# Altium PCB PCB.PcbDoc
Units mm, origin at the board's own origin, x right, y up, seen from the top; angles counter-clockwise.
Board outline 200 x 100 mm, 2 copper layers (Top Layer, Bottom Layer); 95 components, 63 nets, 298 pads, 0 vias.
Unrouted connection lines stored in the file: 204.
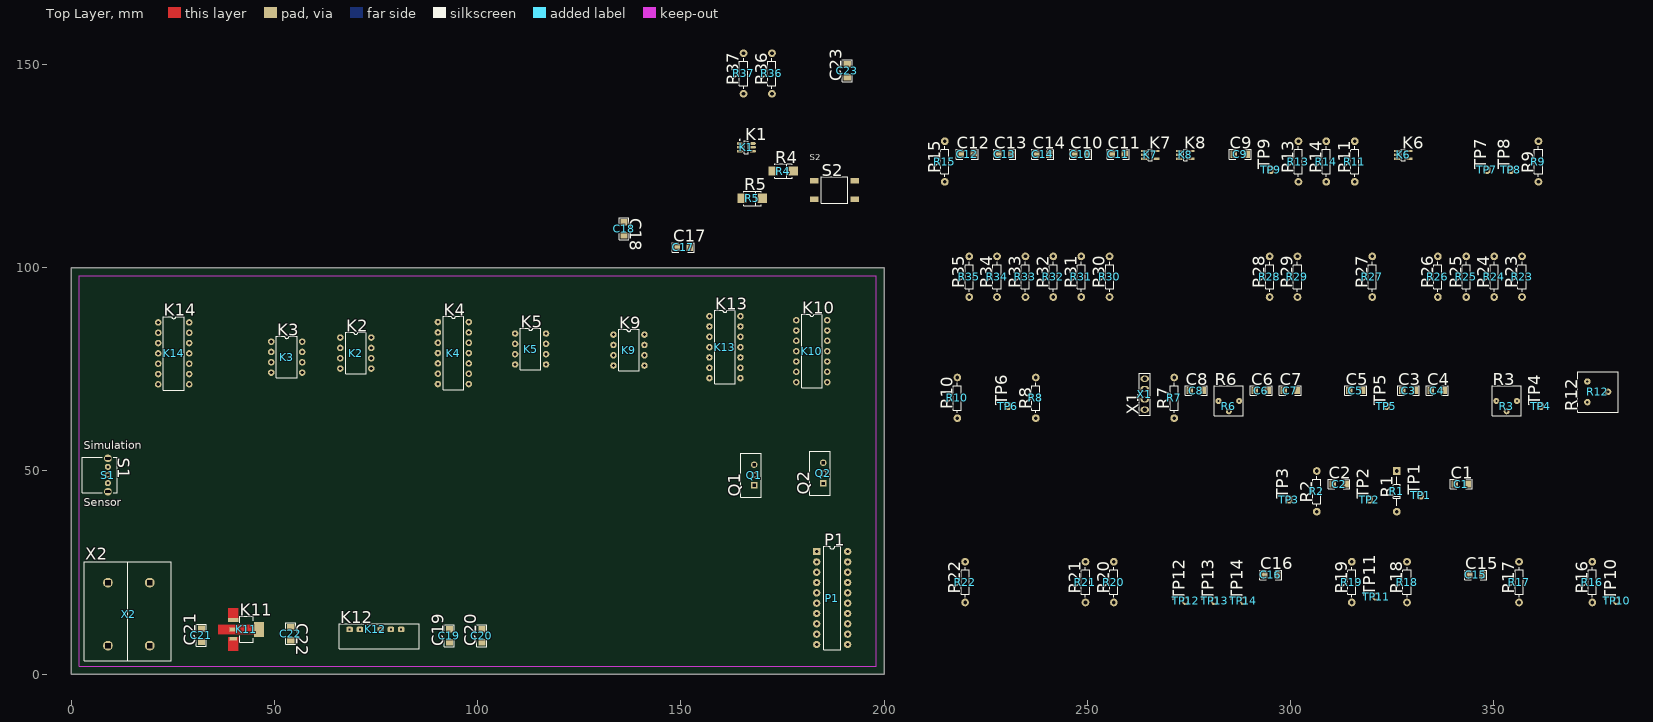
[diagram p0: Top Layer view]
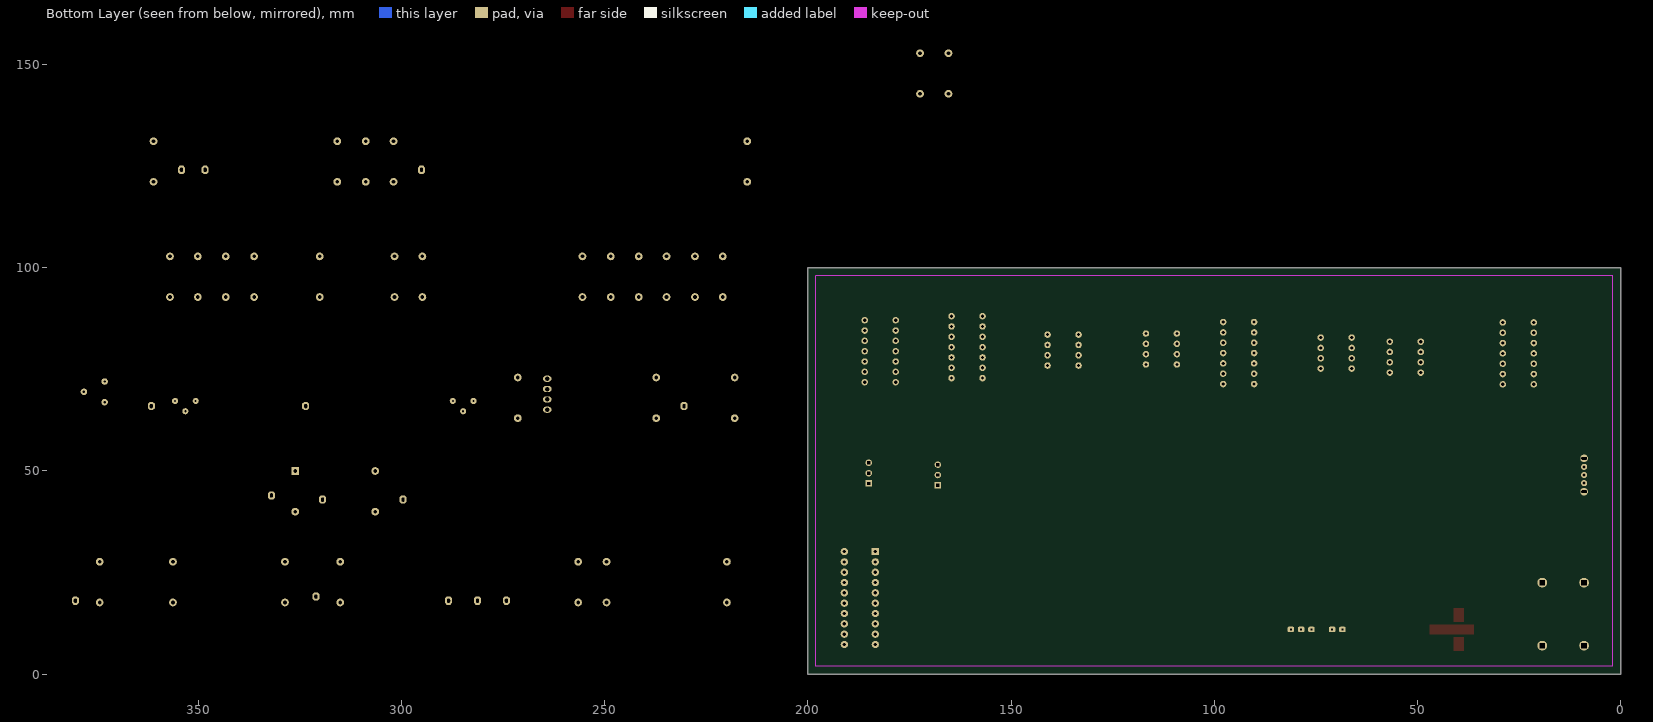
[diagram p1: Bottom Layer view, seen from below]

## Layer stack, top to bottom
Top Solder: solder mask 0.0102, Solder Resist, Dk 3.5
Top Layer: signal copper 0.0356
Dielectric 1: dielectric 0.32, FR-4, Dk 4.8
Bottom Layer: signal copper 0.0356
Bottom Solder: solder mask 0.0102, Solder Resist, Dk 3.5

## Board outline
0,0 200,0 200,100 0,100

## Design rules (kind name [scope] priority, off if disabled: settings)
Clearance [All] p1: gap=0.254 ignorepadtopadclearanceinfootprint=FALSE except(0: Arc-Hole Track-Hole SMDPad-Hole THPad-Hole Via-Hole Fill-Hole Poly-Hole Region-Hole Text-Hole)
PolygonConnect [All] p1: connectstyle=Relief reliefconductorwidth=0.254 reliefentries=4 polygonreliefangle="90 Angle" airgapwidth=0.254
RoutingVias [All] p1: holewidth=0.711 width=1.27 viastyle="Through Hole" minholewidth=0.711 minwidth=1.27 maxholewidth=0.711 maxwidth=1.27
SilkToSilkClearance [All] p1 off: silktosilkclearance=0.254
SolderMaskExpansion [All] p1: expansion=0.102 istentingtop=FALSE
Width Width_Power [InNetClass('Power')] p1: maxlimit=1.27 minlimit=0.381 preferedwidth=0.508
Width [All] p2: maxlimit=0.254 minlimit=0.254 preferedwidth=0.254
29 further rules are at their usual default settings.

## Classes and differential pairs
net class Power: +15 -15 GND NetC21_2 NetC?_2 Vcc

## Components (designator, comment, footprint, x,y, rotation, side; value= is the part's Value field where it differs from the comment)
C1 "1uF" "okCAP CER 1206 H" 341.992,46.764 r0 top
C2 "100nF" "okCAP CER 1206 H" 311.893,46.764 r0 top
C3 "100nF" "okCAP CER 1206 H" 328.995,69.764 r0 top
C4 "100nF" "okCAP CER 1206 H" 336.107,69.764 r0 top
C5 "1uF" "okCAP CER 1206 H" 316.041,69.764 r0 top
C6 "100nF" "okCAP CER 1206 H" 292.8,69.764 r0 top
C7 "100nF" "okCAP CER 1206 H" 299.912,69.764 r0 top
C8 "4.7uF" "okCAP CER 1206 H" 276.798,69.764 r0 top
C9 "100nF" "okCAP CER 1206 H" 287.557,127.901 r0 top
C10 "NM" "okCAP CER 1206 H" 248.314,127.901 r0 top
C11 "330nF" "okCAP CER 1206 H" 257.585,127.901 r0 top
C12 "1.5uF" "okCAP CER 1206 H" 220.374,127.901 r0 top
C13 "100nF" "okCAP CER 1206 H" 229.645,127.901 r0 top
C14 "1.5uF" "okCAP CER 1206 H" 239.043,127.901 r0 top
C15 "100nF" "okCAP CER 1206 H" 345.524,24.425 r0 top
C16 "100nF" "okCAP CER 1206 H" 295.105,24.425 r0 top
C17 "100nF" "okCAP CER 1206 H" 150.6,105 r0 top
C18 "100nF" "okCAP CER 1206 H" 136,109.6 r270 top
C19 "0.1uF" "okCAP CER 1206 H" 93,9.4 r90 top
C20 "0.1uF" "okCAP CER 1206 H" 101,9.4 r90 top
C21 "0.33uF" "okCAP CER 1206 H" 32,9.6 r90 top
C22 "0.1uF" "okCAP CER 1206 H" 54,10 r270 top
C23 "100nF" "okCAP CER 1206 H" 190.915,148.419 r90 top
K1 "M74VHC1G132DTT1G" okTSOP-5 166.074,129.623 r0 top
K2 "RC4558" okDIP8-300 70,79 r0 top
K3 "RC4558" okDIP8-300 53,78 r0 top
K4 "CD74HCT74E" okDIP14-300 94,79 r0 top
K5 "ICM7555IPAZ" okDIP8-300 113,80 r0 top
K6 "74LVC1G14SE-7" okSOT23-5 327.689,127.774 r0 top
K7 "74LVC1G14SE-7" okSOT23-5 265.459,127.774 r0 top
K8 "74LVC1G14SE-7" okSOT23-5 274.095,127.774 r0 top
K9 "RC4558" okDIP8-300 137.19,79.73 r0 top
K10 "MCP6004-I/P" okDIP14-300 182.19,79.46 r0 top
K11 "UA78M05CDCYR" okSOT23-UA78M05 43,11 r0 top
K12 "TBA 1-0523E" "OKTBA 1-0523E" 68.46,11 r0 top
K13 "MCP6004-I/P" okDIP14-300 160.81,80.46 r0 top
K14 "MCP6004-I/P" okDIP14-300 25.19,78.92 r0 top
P1 "LTA-1000G" okDIP20 183.38,30.16 r0 top
Q1 "IRF610" okTO-220-1 168,46.46 r90 top
Q2 "IRF610" okTO-220-1 185,46.92 r90 top
R1 "1N4148" "okDiode 10mm" 326.117,44.986 r90 top
R2 "Resistor" "okRES 10mm" 306.432,44.986 r90 top value=39k
R3 "RPot" ok3362P 350.585,67.224 r0 top value=2k
R4 "MBRS360T3G" "okDiode DO-214AA SMB H" 175.167,123.781 r0 top
R5 "MBRS360T3G" "okDiode DO-214AA SMB H" 167.547,117.05 r0 top
R6 "RPot" ok3362P 282.259,67.224 r0 top value=2k
R7 "Resistor" "okRES 10mm" 271.337,67.986 r90 top value=150
R8 "Resistor" "okRES 10mm" 237.301,67.986 r90 top value=150
R9 "Resistor" "okRES 10mm" 360.963,126.123 r90 top value=1k
R10 "Resistor" "okRES 10mm" 217.997,67.986 r90 top value=1k
R11 "Resistor" "okRES 10mm" 315.751,126.123 r90 top value=1k
R12 "RPot" ok3386F 373,66.92 r90 top value=100k
R13 "Resistor" "okRES 10mm" 301.908,126.123 r90 top value=1.5k
R14 "Resistor" "okRES 10mm" 308.766,126.123 r90 top value=1.5k
R15 "Resistor" "okRES 10mm" 214.913,126.123 r90 top value=10k
R16 "Resistor" "okRES 10mm" 374.226,22.647 r90 top value=10k
R17 "Resistor" "okRES 10mm" 356.192,22.647 r90 top value=250
R18 "Resistor" "okRES 10mm" 328.633,22.647 r90 top value=500
R19 "Resistor" "okRES 10mm" 315.044,22.647 r90 top value=500
R20 "Resistor" "okRES 10mm" 256.497,22.647 r90 top value=500
R21 "Resistor" "okRES 10mm" 249.512,22.647 r90 top value=270
R22 "Resistor" "okRES 10mm" 219.902,22.647 r90 top value=270
R23 "Resistor" "okRES 10mm" 356.917,97.784 r90 top value=270
R24 "Resistor" "okRES 10mm" 350.059,97.784 r90 top value=500
R25 "Resistor" "okRES 10mm" 343.201,97.784 r90 top value=270
R26 "Resistor" "okRES 10mm" 336.216,97.784 r90 top value=270
R27 "Resistor" "okRES 10mm" 320.087,97.784 r90 top value=270
R28 "Resistor" "okRES 10mm" 294.814,97.784 r90 top value=500
R29 "Resistor" "okRES 10mm" 301.672,97.784 r90 top value=270
R30 "Resistor" "okRES 10mm" 255.444,97.784 r90 top value=270
R31 "Resistor" "okRES 10mm" 248.459,97.784 r90 top value=270
R32 "Resistor" "okRES 10mm" 241.601,97.784 r90 top value=270
R33 "Resistor" "okRES 10mm" 234.743,97.784 r90 top value=500
R34 "Resistor" "okRES 10mm" 227.758,97.784 r90 top value=500
R35 "Resistor" "okRES 10mm" 220.9,97.784 r90 top value=500
R36 "Resistor" "okRES 10mm" 172.373,147.784 r90 top value=500
R37 "Resistor" "okRES 10mm" 165.388,147.784 r90 top value=250
S1 "Schiebeschalter" okSCHIEBESCHALTER 9,53.1 r270 top
S2 "SW-PB" okdrucktaster 182.787,121.368 r0 top
TP1 "Lötstützpunkt" okLötstützpunkt 331.959,43.97 r90 top
TP2 "Lötstützpunkt" okLötstützpunkt 319.386,42.954 r90 top
TP3 "Lötstützpunkt" okLötstützpunkt 299.574,42.954 r90 top
TP4 "Lötstützpunkt" okLötstützpunkt 361.507,65.954 r90 top
TP5 "Lötstützpunkt" okLötstützpunkt 323.534,65.954 r90 top
TP6 "Lötstützpunkt" okLötstützpunkt 230.443,65.954 r90 top
TP7 "Lötstützpunkt" okLötstützpunkt 348.263,124.091 r90 top
TP8 "Lötstützpunkt" okLötstützpunkt 354.105,124.091 r90 top
TP9 "Lötstützpunkt" okLötstützpunkt 295.05,124.091 r90 top
TP10 "Lötstützpunkt" okLötstützpunkt 380.195,18.075 r90 top
TP11 "Lötstützpunkt" okLötstützpunkt 321.013,19.091 r90 top
TP12 "Lötstützpunkt" okLötstützpunkt 274.15,18.075 r90 top
TP13 "Lötstützpunkt" okLötstützpunkt 281.262,18.075 r90 top
TP14 "Lötstützpunkt" okLötstützpunkt 288.374,18.075 r90 top
X1 "Header 4" "okHeader Female 4pin" 264.098,65.065 r90 top
X2 "Baureihe A-2.107" ok24.243.X 19.3,7 r180 top

## Footprints (in the part's own frame and the unit in brackets; to place one, negate y for a bottom-side part, rotate by r counter-clockwise, add the part's x,y. Pads: shape width x height; smd on the part's side, far side on the other; paste and mask are expansions set on the pad)
ok24.243.X [mm] "Bananenstecker"
  round 2.4 hole 1.3 square: A1(0,0) A2(0,-15.5) B1(10.3,0) B2(10.3,-15.5)
  silkscreen extent -5.28,-20.7 16.15,3.7, body extent -5.05,-20.5 15.95,3.5, height 13
ok3362P [mm]
  round 1.5 hole 0.5: 1(0,0) 2(2.54,-2.54) 3(5.08,0)
  silkscreen extent -1.05,-3.62 6.12,3.72, body extent -0.75,-3.44 5.85,3.54, height 4.4
ok3386F [mm]
  round 1.6 hole 0.6: 1(5.08,0) 2(2.54,-5.08) 3(0,0)
  silkscreen extent -2.45,-7.54 7.52,2.41, body extent -2.24,-7.35 7.32,2.21, height 4.83
"okCAP CER 1206 H" [mm] "1206 ceramic capacitor for hand soldering"
  rect 1.6x1.75 smd: 1(-1.6,0) 2(1.6,0)
  silkscreen extent -2.7,-1.2 2.7,1.2, body extent -1.6,-0.8 1.6,0.8, height 1.15
"okDiode 10mm" [mm] "Diode for tht mounting with a 10mm pitch"
  rect 1.9x1.9 hole 0.9: A(5,0)
  round 1.9 hole 0.9: C(-5,0)
  silkscreen extent -3.6,-0.9 3.6,0.9, body extent -5.35,-0.9 5.36,0.9, height 1.82
"okDiode DO-214AA SMB H" [mm] "Diode in DO-214AA (same as SMB) package for hand soldering"
  rect 2.3x2.3 smd: 1(2.45,0) 3(-2.45,0)
  silkscreen extent -2.15,-1.8 2.15,1.8, body extent -2.7,-1.8 2.7,1.8, height 2.3
okDIP8-300 [mm] "DIP8 300mil width"
  round 1.6 hole 0.8: 1(-3.81,3.81) 2(-3.81,1.27) 3(-3.81,-1.27) 4(-3.81,-3.81) 5(3.81,-3.81) 6(3.81,-1.27) 7(3.81,1.27) 8(3.81,3.81)
  silkscreen extent -2.54,-5.08 2.54,5.08, body extent -3.88,-5.4 3.88,5.4, height 4.5
okDIP14-300 [mm] "DIP14 300mil width"
  round 1.6 hole 0.8: 1(-3.81,7.62) 2(-3.81,5.08) 3(-3.81,2.54) 4(-3.81,0) 5(-3.81,-2.54) 6(-3.81,-5.08) 7(-3.81,-7.62) 8(3.81,-7.62) 9(3.81,-5.08) 10(3.81,-2.54) 11(3.81,0) 12(3.81,2.54) 13(3.81,5.08) 14(3.81,7.62)
  silkscreen extent -2.54,-9.05 2.54,9.05, body extent -3.88,-9.05 3.88,9.05, height 4.5
okDIP20 [mm]
  rect 1.8x1.8 hole 0.8: 1(0,0)
  round 1.8 hole 0.8: 2(0,-2.54) 3(0,-5.08) 4(0,-7.62) 5(0,-10.16) 6(0,-12.7) 7(0,-15.24) 8(0,-17.78) 9(0,-20.32) 10(0,-22.86) 11(7.62,-22.86) 12(7.62,-20.32) 13(7.62,-17.78) 14(7.62,-15.24) 15(7.62,-12.7) 16(7.62,-10.16) 17(7.62,-7.62) 18(7.62,-5.08) 19(7.62,-2.54) 20(7.62,0)
  silkscreen extent 1.73,-24.13 5.89,1.27, body extent -1.25,-24.2 8.91,1.2, height 4.61
okdrucktaster [mm]
  rect 2.1x1.4 smd: 1(0,0) 4(10,-4.5) ""(0,-4.5) ""(10,0)
  silkscreen extent 1.75,-5.5 8.25,1, body extent 0,-5.25 10,0.75, height 4.3
"okHeader Female 4pin" [mm]
  oval 1.5x2.1 hole 1.1: 1(0,0) 2(2.54,0) 3(5.08,0) 4(7.62,0)
  silkscreen extent -1.35,-1.35 8.95,1.33, body extent -1.28,-1.3 8.88,1.24, height 4.45
okLötstützpunkt [mm]
  oct 2x1.7 hole 0.7 slot 1 at 0 deg: 1(0,0)
"okRES 10mm" [mm] "resistor for tht mounting with a 10mm pitch"
  round 1.9 hole 0.9: 1(-5,0) 2(5,0)
  silkscreen extent -3.7,-1 3.7,1, body extent -5.38,-1.2 5.38,1.2, height 2.41
okSCHIEBESCHALTER [mm]
  round 1.5 hole 0.7: 1(2.1,0) 2(4.1,0) 3(6.1,0)
  round 1.9 hole 1.4 slot 0.6 at 0 deg: ""(0,0) ""(8.2,0)
  silkscreen extent -0.3,-6.3 8.5,2.3, body extent -0.2,-6.2 8.4,2.2, height 4.7
okSOT23-5 [mm] "SOT23-5"
  rect 1.5x0.55 smd: 1(-1.5,0.95) 2(-1.5,0) 3(-1.5,-0.95) 4(1.5,-0.95) 5(1.5,0.95)
  silkscreen extent -0.45,-1.4 0.45,1.4, body extent -1.4,-1.45 1.4,1.45, height 1.24
okSOT23-UA78M05 [mm]
  rect 2.5x0.95 smd: 1(-3.15,2.3)
  rect 1.75x0.95 smd: 2(-3.15,0) 3(-3.15,-2.3)
  rect 2.5x3.6 smd: 4(3.15,0)
  Top Layer region: -1.925,-1.825 -4.4,-1.825 -4.4,-5.325 -1.925,-5.325
  Top Layer region: -6.9,-1.25 4,-1.25 4,1.25 -6.9,1.25
  Top Layer region: -4.4,1.825 -1.9,1.825 -1.9,5.325 -4.4,5.325
  silkscreen extent -1.6,-3.2 1.8,3.25, body extent -3.5,-3.25 3.5,3.25, height 1.8
"OKTBA 1-0523E" [mm]
  rrect50% 1.6x1.35 hole 0.35 square: 1(0,0) 2(2.54,0) 4(7.62,0) 5(10.16,0) 6(12.7,0)
  silkscreen extent -2.5,-4.7 17.2,1.4, body extent -2.4,-4.65 17.1,1.35, height 10
okTO-220-1 [mm] "TO-220-1"
  rect 1.6x1.6 hole 0.7 square: 1(0,0)
  round 1.6 hole 0.7 square: 2(2.54,0) 3(5.08,0)
  silkscreen extent -2.9,-1.7 7.9,3.3, body extent -2.84,-1.6 7.83,3.23, height 22.66
okTSOP-5 [mm] "TSOP, 6-Leads, Body 3.00x1.50mm, Pitch 0.95mm, IPC Medium Density"
  oval 1.5x0.65 smd: 1(-1.6,0.95) 2(-1.6,0) 3(-1.6,-0.95) 4(1.6,-0.95) 5(1.6,0) 6(1.6,0.95)
  silkscreen extent -1.72,-1.6 0.45,1.95, body extent -1.38,-1.6 1.38,1.6, height 1.1

## Part data
C1 C2 C3 C4 C5 C6 C7 C8 C9 C10 C11 C12 C13 C14 C15 C16 C17 C18 C19 C20 C21 C22 C23: library part CAP0805, "Capacitor", Arrow Part Number=08055A101JAT2A, Manufacturer_Name=AVX, Mouser Part Number=581-08055A101J, Arrow Price/Stock=https://www.arrow.com/en/products/08055a101jat2a/avx, Datasheet Link=https://componentsearchengine.com/Datasheets/1/06031A100FAT2A.pdf, Height=0.94mm, Manufacturer_Part_Number=08055A101JAT2A, Mouser Price/Stock=https://www.mouser.co.uk/ProductDetail/AVX/08055A101JAT2A?qs=o9qE778H9QGBR%2FfSpI%2FCIw%3D%3D
K1: library part M74VHC1G132DFT1G, "Integrated Circuit", Manufacturer_Name="ON Semiconductor", Mouser Part Number=863-M74VHC1G132DFT1G, Arrow Part Number=M74VHC1G132DFT1G, Datasheet Link=http://www.onsemi.com/pub/Collateral/MC74VHC1G132-D.PDF, Height=1.1mm, Manufacturer_Part_Number=M74VHC1G132DFT1G, Mouser Price/Stock=https://www.mouser.co.uk/ProductDetail/ON-Semiconductor/M74VHC1G132DFT1G?qs=3JMERSakeboO%2F%2FN0rc0eEw%3D%3D
K2 K3 K9: "Dual OPAMP / Dual Supply 5-15V", Supplier Part Number 1=595-RC4558P, Supplier 1=Mouser
K4: "Integrated Circuit", Manufacturer_Name="Texas Instruments", Mouser Part Number=595-CD74HCT74E, Arrow Part Number=CD74HCT74E, Arrow Price/Stock=https://www.arrow.com/en/products/cd74hct74e/texas-instruments, Datasheet Link=http://www.ti.com/lit/gpn/cd74hct74, Height=5.08mm, Manufacturer_Part_Number=CD74HCT74E, Mouser Price/Stock=https://www.mouser.com/Search/Refine.aspx?Keyword=595-CD74HCT74E
K5: "Integrated Circuit", Arrow Part Number=ICM7555CBAZ, Manufacturer_Name=Intersil, Mouser Part Number=968-ICM7555CBAZ, Arrow Price/Stock=https://www.arrow.com/en/products/icm7555cbaz/intersil, Datasheet Link=http://componentsearchengine.com/Datasheets/3/ICM7555CBAZ.pdf, Height=1.75mm, Manufacturer_Part_Number=ICM7555CBAZ, Mouser Price/Stock=http://www.mouser.com/Search/ProductDetail.aspx?qs=9fLuogzTs8L0U86ICDKxeg%3d%3d
K6 K7 K8: "Integrated Circuit", Arrow Part Number=74AHC1G04SE-7, Manufacturer_Name="Diodes Inc.", Mouser Part Number=621-74AHC1G04SE-7, Arrow Price/Stock=https://www.arrow.com/en/products/74ahc1g04se-7/diodes-incorporated, Datasheet Link=https://componentsearchengine.com/Datasheets/2/74AHC1G04SE-7.pdf, Height=1.1mm, Manufacturer_Part_Number=74AHC1G04SE-7, Mouser Price/Stock=https://www.mouser.com/Search/Refine.aspx?Keyword=621-74AHC1G04SE-7
K10 K13 K14: "Quad OPAMP / Single Supply 1.8-6.3V / Rail to Rail", Supplier Part Number 1=579-MCP6004-I/P, Supplier 1=Mouser
K11: "Integrated Circuit", Manufacturer_Name="Texas Instruments", Mouser Part Number=595-UA78M05CDCYR, Arrow Part Number=UA78M05CDCYR, Arrow Price/Stock=https://www.arrow.com/en/products/ua78m05cdcyr/texas-instruments, Datasheet Link=http://www.ti.com/lit/gpn/ua78m, Height=1.8mm, Manufacturer_Part_Number=UA78M05CDCYR, Mouser Price/Stock=https://www.mouser.co.uk/ProductDetail/Texas-Instruments/UA78M05CDCYR?qs=Tv815z3GeNQBLgK%2F7rn3pg%3D%3D
K12: "DC/DC"
P1: "Display", Manufacturer_Name=Lite-On, Mouser Part Number=859-LTA-1000G, Arrow Part Number=LTA-1000G, Arrow Price/Stock=https://www.arrow.com/en/products/lta-1000g/lite-on-technology, Datasheet Link=https://optoelectronics.liteon.com/upload/download/DS-30-92-0809/A1000G.pdf, Height=8.25mm, Manufacturer_Part_Number=LTA-1000G, Mouser Price/Stock=https://www.mouser.co.uk/ProductDetail/Lite-On/LTA-1000G?qs=%2FTKcI5XXRKq0QINzVmwJHg%3D%3D
Q1 Q2: "MOSFET (N-Channel); Reset", Arrow Part Number=2N7002, Manufacturer_Name=Nexperia, Mouser Part Number=N/A, Datasheet Link=http://docs-emea.rs-online.com/webdocs/1385/0900766b813856ab.pdf, Height=1.1mm, Manufacturer_Part_Number=2N7002, Mouser Price/Stock=https://www.mouser.com/Search/Refine.aspx?Keyword=N%2FA
R1: library part Diode, "Diode", LatestRevisionDate=03.04.2019, Publisher="ICT Berufsbildungscenter AG"
R3 R6 R12: "Potentiometer", LatestRevisionDate=17-Jul-2002, LatestRevisionNote="Re-released for DXP Platform.", PackageDescription="Variable Resistor, Thru-Hole; 3 Leads", PackageReference=VR5, Published=8-Jun-2000, Publisher="Altium Limited", Set Position=0.5, Sim Note="Enter the Resistance value and the set point into parameter fields."
R4 R5: library part "Schottky Diode", "Schottky Diode", ComponentLink1Description="Manufacturer Link", ComponentLink1URL=http://www.irf.com/, ComponentLink2Description=Datasheet, ComponentLink2URL=http://www.irf.com/product-info/datasheets/data/10tq.pdf, DatasheetVersion=PD-2.057B, LatestRevisionDate=17-Jul-2002, LatestRevisionNote="Re-released for DXP Platform.", Note="Terminal 2 is the TAB and is electrically connected to the cathode", PackageDescription="TO, Thru-Hole, Vertical, Heatsink Mounted; 3 In-Line Leads (1 Absent); Pitch 2.54 mm", PackageReference=TO-220AC, PackageVersion=Feb-1998, Published=8-Jun-2000, Publisher="Altium Limited"
S1: "Switch, THT", ComponentLink1Description="Manufacturer Link", ComponentLink1URL=http://www.apem.com, DatasheetVersion=05-Dec-2000, LatestRevisionDate=17-Dec-2003, LatestRevisionNote="Schematic revised, PCB Footprint replaced.", PackageDescription="Switch; 4 Leads", PackageReference=TL36WW15050, Published=24-Mar-1999, Publisher="Altium Limited"
S2: library part Drucktaster, "Switch, SMD", LatestRevisionDate=17-Jul-2002, LatestRevisionNote="Re-released for DXP Platform.", PackageDescription="Switch; 2 Leads", PackageReference=SPST-2, Published=24-Mar-1999, Publisher="Altium Limited"
TP1 TP2 TP3 TP4 TP5 TP6 TP7 TP8 TP9 TP10 TP11 TP12 TP13 TP14: library part Testpunkt
X1: "Header, 4-Pin", LatestRevisionDate=17-Jul-2002, LatestRevisionNote="Re-released for DXP Platform.", Publisher="Altium Limited"
X2: library part Bananenstecker, "Laborgerätanschluss, 4mm", LatestRevisionDate=17-Jul-2002, LatestRevisionNote="Re-released for DXP Platform.", Publisher="Altium Limited"
R2 R7 R8 R9 R10 R11 R13 R14 R15 R16 R17 R18 R19 R20 R21 R22 R23 R24 R25 R26 R27 R28 R29 R30 R31 R32 R33 R34 R35 R36 R37: LatestRevisionDate=02.04.2019, Publisher="ICT Berufsbildungscenter AG"

## Nets (pads, with @x,y where several pads share a name; then routed paths per layer and width w, separated by ;. In a path a pad name is that pad's centre, name@x,y a point inside that pad or via, vN(x,y) a via of type N, cw(c..) or ccw(c..) an arc to the next point about the centre after c; other vN are vias at no path point)
+15: C3.2 C6.2 C16.2 C20.2 K2.8 K3.8 K9.8 K12.6 TP13.1
-15: C4.2 C7.2 C17.2 C19.2 K2.4 K3.4 K9.4 K12.4 TP14.1
Balkenanzeige: K2.6 K2.7 R16.1 TP4.1
GND: C2.1 C3.1 C4.1 C5.1 C6.1 C7.1 C8.1 C9.1 C10.1 C11.1 C12.1 C13.1 C14.1 C15.1 C16.1 C17.1 C18.1 C19.1 C20.1 C21.1 C22.1 C23.1 K1.3 K3.3 K4.7 K5.1 K6.3 K7.3 K8.3 K9.3 K10.11 K11.2 K11.4 K12.2 K13.11 K14.11 P1.11 P1.12 P1.13 P1.14 P1.15 P1.16 P1.17 P1.18 P1.19 P1.20 Q2.3 R37.1 S2.4 TP11.1 X1.4 X2.B1 X2.B2
NetC1_1: C1.1 K3.2 R2.2 R8.1
NetC1_2: C1.2 K2.3 K3.1 Q1.2 TP2.1
NetC5_2: C5.2 K2.5 R1.A R7.2 TP1.1
NetC8_2: C8.2 K1.2 R4.3 R5.1 TP5.1
NetC10_2: C10.2 K5.5
NetC11_2: C11.2 K5.6 K5.7 R12.2 TP9.1
NetC12_2: C12.2 K7.2 R13.1
NetC14_2: C14.2 K8.2 R14.2
NetC21_2: C21.2 K11.1 X2.A1 X2.A2
NetK1_4: K1.4 R3.3 R6.3 TP3.1 X1.2
NetK2_1: K2.1 K2.2 R1.C
NetK4_1: K4.1 K7.4
NetK4_2: K4.2 R9.1
NetK4_3: K4.3 K6.2 R2.1 S1.2 TP6.1
NetK4_5: K4.5 Q1.1 R13.2 TP7.1
NetK4_9: K4.9 Q2.1 R14.1 TP8.1
NetK4_11: K4.11 K6.4
NetK4_12: K4.12 R10.1
NetK4_13: K4.13 K8.4
NetK5_2: K5.2 R11.1 S2.1
NetK5_3: K5.3 S1.1
NetK9_1: K9.1 K10.3 K10.5 K10.10 K10.12 K13.3 K13.5 K13.10 K13.12 K14.3 K14.5 R15.2 TP10.1
NetK9_2: K9.2 R15.1 R16.2
NetK10_1: K10.1 R21.1
NetK10_2: K10.2 R17.1 R18.2
NetK10_6: K10.6 R18.1 R19.2
NetK10_7: K10.7 R22.1
NetK10_8: K10.8 R23.1
NetK10_9: K10.9 R19.1 R20.2
NetK10_13: K10.13 R20.1 R24.2
NetK10_14: K10.14 R25.1
NetK13_1: K13.1 R26.1
NetK13_2: K13.2 R24.1 R28.2
NetK13_6: K13.6 R28.1 R33.2
NetK13_7: K13.7 R27.1
NetK13_8: K13.8 R29.1
NetK13_9: K13.9 R33.1 R34.2
NetK13_13: K13.13 R34.1 R35.2
NetK13_14: K13.14 R30.1
NetK14_1: K14.1 R31.1
NetK14_2: K14.2 R35.1 R36.2
NetK14_6: K14.6 R36.1 R37.2
NetK14_7: K14.7 R32.1
NetP1_1: P1.1 R21.2
NetP1_2: P1.2 R22.2
NetP1_3: P1.3 R23.2
NetP1_4: P1.4 R25.2
NetP1_5: P1.5 R26.2
NetP1_6: P1.6 R27.2
NetP1_7: P1.7 R29.2
NetP1_8: P1.8 R30.2
NetP1_9: P1.9 R31.2
NetP1_10: P1.10 R32.2
NetQ1_3: Q1.3 R8.2
NetQ2_2: Q2.2 R7.1
NetR3_2: R3.2 R4.1
NetR5_3: R5.3 R6.1
NetS1_3: S1.3 X1.3
Vcc: C2.2 C9.2 C13.2 C15.2 C18.2 C22.2 C23.2 K1.1 K1.5 K4.14 K5.4 K5.8 K6.5 K7.5 K8.5 K10.4 K11.3 K12.1 K13.4 K14.4 R9.2 R10.2 R11.2 R12.3 R17.2 TP12.1 X1.1
pads on no net: K1.6 K3.5 K3.6 K3.7 K4.4 K4.6 K4.8 K4.10 K6.1 K7.1 K8.1 K9.5 K9.6 K9.7 K12.5 K14.8 K14.9 K14.10 K14.12 K14.13 K14.14 R3.1 R6.2 R12.1 S1. S2.

## Keep-outs
Keep-Out Layer:
  lines w0.05: 2,2 198,2 198,98 2,98 2,2

## Silkscreen, mask and mechanical layers (free items; w line width, h text height)
Mechanical 1:
  the board outline again, w0.05

## Text inside footprints (layer, text, board x,y; h text height)
S1: Top Overlay "Sensor" at 3.001,41.332 h2 r0.23; Top Overlay "Simulation" at 3.002,55.318 h2 r0.23